# Allegro board Hirose7039_A1.brd
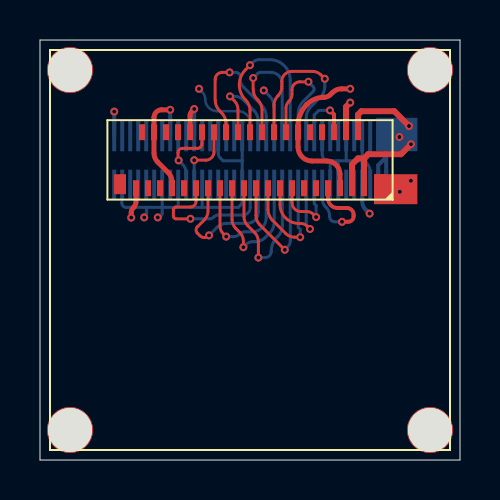
[diagram p0: board, top side]
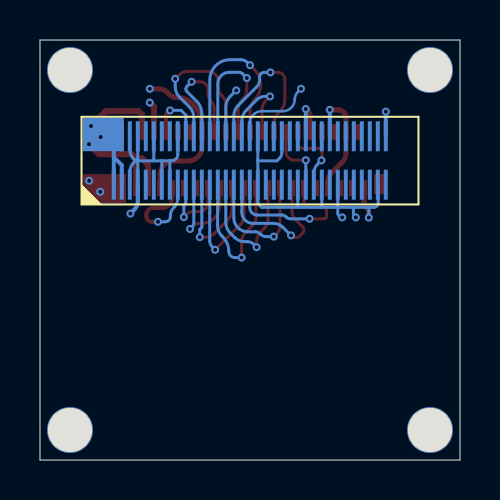
[diagram p1: board, bottom side, seen from below]

Outline 21 x 21 mm; copper layers: TOP, BOTTOM. Coordinates in mm from the lower left corner of the outline.
Outline path: 0,21 0,0 21,0 21,21 0,21

## Design rules (mm)
constraint set DEFAULT: min track width 0.127

## Placement (name value [footprint] x y rotation side)
J3  Hirose FH35C-39S-0.3SHW  [FH35C-39S-0D3SHW]  10.5 13.59 0 top
J8  DF40HC(3.0)-70DS-0.4V(51)  [DF40HC-70DS_]  17.31 16.18 180 bottom
NOREF  -  [unnamed]  19.5 19.5 0 top
NOREF#2  -  [unnamed]  19.5 1.5 0 top
NOREF#3  -  [unnamed]  1.5 19.5 0 top
NOREF#4  -  [unnamed]  1.5 1.5 0 top

## Library data of the parts
J3 = HiroseFPC_0
J8 = Header2x35

## Footprints (pads in the part's own frame, mm; a bottom-side part is the same pattern mirrored in y, then rotated)
DF40HC-70DS_
  rect 0.2x1.5 smd: 1(0,-2.42) 2(0,0) 3(0.4,-2.42) 4(0.4,0) 5(0.8,-2.42) 6(0.8,0) 7(1.2,-2.42) 8(1.2,0) 9(1.6,-2.42) 10(1.6,0) 11(2,-2.42) 12(2,0) 13(2.4,-2.42) 14(2.4,0) 15(2.8,-2.42) 16(2.8,0) 17(3.2,-2.42) 18(3.2,0) 19(3.6,-2.42) 20(3.6,0) 21(4,-2.42) 22(4,0) 23(4.4,-2.42) 24(4.4,0) 25(4.8,-2.42) 26(4.8,0) 27(5.2,-2.42) 28(5.2,0) 29(5.6,-2.42) 30(5.6,0) 31(6,-2.42) 32(6,0) 33(6.4,-2.42) 34(6.4,0) 35(6.8,-2.42) 36(6.8,0) 37(7.2,-2.42) 38(7.2,0) 39(7.6,-2.42) 40(7.6,0) 41(8,-2.42) 42(8,0) 43(8.4,-2.42) 44(8.4,0) 45(8.8,-2.42) 46(8.8,0) 47(9.2,-2.42) 48(9.2,0) 49(9.6,-2.42) 50(9.6,0) 51(10,-2.42) 52(10,0) 53(10.4,-2.42) 54(10.4,0) 55(10.8,-2.42) 56(10.8,0) 57(11.2,-2.42) 58(11.2,0) 59(11.6,-2.42) 60(11.6,0) 61(12,-2.42) 62(12,0) 63(12.4,-2.42) 64(12.4,0) 65(12.8,-2.42) 66(12.8,0) 67(13.2,-2.42) 68(13.2,0) 69(13.6,-2.42) 70(13.6,0)
FH35C-39S-0D3SHW
  rect 0.3x0.8 smd: 1(5.7,0) 2(5.4,2.8) 3(5.1,0) 4(4.8,2.8) 5(4.5,0) 6(4.2,2.8) 7(3.9,0) 8(3.6,2.8) 9(3.3,0) 10(3,2.8) 11(2.7,0) 12(2.4,2.8) 13(2.1,0) 14(1.8,2.8) 15(1.5,0) 16(1.2,2.8) 17(0.9,0) 18(0.6,2.8) 19(0.3,0) 20(0,2.8) 21(-0.3,0) 22(-0.6,2.8) 23(-0.9,0) 24(-1.2,2.8) 25(-1.5,0) 26(-1.8,2.8) 27(-2.1,0) 28(-2.4,2.8) 29(-2.7,0) 30(-3,2.8) 31(-3.3,0) 32(-3.6,2.8) 33(-3.9,0) 34(-4.2,2.8) 35(-4.5,0) 36(-4.8,2.8) 37(-5.1,0) 38(-5.4,2.8) 39(-5.7,0)
  rect 0.6x1 smd: 40(6.5,0.2) 41(-6.5,0.2)
unnamed
  round 2.3 hole 2.2 unplated: (0,0)

## Nets
GND: J3.4 J3.5 J3.12 J3.30 J3.33 J3.36 J3.39 J3.40 J3.41 J8.5 J8.6 J8.7 J8.8 J8.12 J8.13 J8.15 J8.18 J8.37 J8.38 J8.44 J8.47 J8.50 J8.53 J8.56 J8.57 J8.67 J8.70
IR_1V8: J8.9 J8.10 J8.11
IR_3V3: J8.14 J8.16
IR_5V0: J3.1 J3.2 J3.3(VDD50#3) J8.1 J8.2 J8.3 J8.4
IR_D0: J3.13 J8.19
IR_D1: J3.14 J8.24
IR_D2: J3.15 J8.21
IR_D3: J3.16 J8.22
IR_D4: J3.17 J8.23
IR_D5: J3.18 J8.28
IR_D6: J3.19 J8.25
IR_D7: J3.20 J8.26
IR_D8: J3.21 J8.27
IR_D9: J3.22 J8.34
IR_D10: J3.23 J8.29
IR_D11: J3.24 J8.32
IR_D12: J3.25 J8.31
IR_D13: J3.26 J8.49
IR_D14: J8.36
IR_D15: J8.30
IR_HSYNC: J3.28 J8.51
IR_PCLK: J3.29 J8.35
IR_UART_RX: J3.6 J8.20
IR_UART_TX: J3.7 J8.17
IR_VSYNC: J3.27 J8.33

Pads without a net: J3 8 9 10 11 31 32 34 35 37 38; J8 39 40 41 42 43 45 46 48 52 54 55 58 59 60 61 62 63 64 65 66 68 69

## Via types
v1: diameter 0.4, hole 0.2, TOP to BOTTOM, 35 vias

## Routing (per net, layer and track width the routed paths; a pad name or vN(x,y) marks a point on that pad's centre or on a via; arc(x,y) is an arc through that point)
GND: length 52.8
  TOP w0.25: J3.33 6.6,13.92 arc(6.55,14.16) 6.41,14.37 5.89,14.89 arc(5.75,15.1) 5.7,15.34 J3.36 5.7,17.12 arc(5.81,17.4) 6.08,17.51 v1(6.51,17.51) ; J3.30 7.5,17.21 arc(7.52,17.33) 7.59,17.43 v1(7.71,17.55) ; J3.39 4.8,12.9 arc(4.77,12.76) 4.69,12.64 4.67,12.62 arc(4.59,12.5) 4.56,12.36 v1(4.56,12.12) ; v1(15.51,18.56) 15.09,18.56 arc(14.83,18.51) 14.61,18.36 14.52,18.27 arc(14.37,18.17) 14.2,18.14 arc(13.74,18.04) 13.35,17.78 arc(13.02,17.29) 12.9,16.71 J3.12 12.9,15.65 arc(13.11,15.16) 13.6,14.95 14.34,14.95 arc(14.81,14.76) 15,14.29 J3.5
  TOP w0.3: v1(15.51,17.87) 15.3,17.66 J3.4
  BOTTOM w0.15: 6.91,12.63 6.11,12.63 ; 6.91,12.63 8.1,12.63 ; 6.91,12.63 6.91,13.77 ; 6.11,12.63 6.11,13.77 ; 6.11,12.63 6.11,12.35 arc(6.05,12.19) v1(5.89,12.13) ; 6.11,12.63 5.33,12.63 ; 8.1,12.63 9.92,12.63 10.02,12.74 arc(10.09,12.83) 10.11,12.95 10.11,14.94 10.13,14.96 ; 8.1,12.63 8.11,12.64 8.11,13.77 ; J8.12 15.31,14.99 15.34,14.96 ; 15.34,14.96 14.9,14.96 ; 15.34,14.96 16.23,14.96 ; 14.9,14.96 14.91,14.95 J8.13 ; 14.9,14.96 14.54,14.96 ; J8.18 14.11,15.28 arc(14.2,15.05) 14.43,14.96 14.54,14.96 ; 14.54,14.96 14.51,14.93 J8.15 ; 4.56,12.63 5.33,12.63 ; 4.56,12.63 v1(4.56,12.12) ; 4.56,12.63 4.31,12.63 arc(4.15,12.69) 4.09,12.85 4.09,13.75 4.11,13.77 ; 5.33,12.63 5.33,12.32 arc(5.32,12.25) 5.28,12.2 v1(5.21,12.13) ; 16.23,14.96 16.11,15.08 J8.8 ; 16.23,14.96 16.11,14.84 J8.7 ; 16.23,14.96 16.31,14.88 arc(16.46,14.65) 16.51,14.39 J8.5 ; 16.23,14.96 16.31,15.04 arc(16.46,15.27) 16.51,15.53 J8.6 ; 10.13,14.96 9.15,14.96 9.02,15.09 arc(8.94,15.21) 8.91,15.35 8.91,16.18 ; 10.13,14.96 10.11,14.98 10.11,16.18
  BOTTOM w0.2: 6.51,16.18 v1(6.51,17.51) ; v1(16.48,12.32) 16.28,12.52 arc(16.15,12.71) 16.11,12.93 J8.7 ; 3.71,16.18 v1(3.71,17.42) ; 7.71,16.18 v1(7.71,17.55)
  vias: v1(17.99,13.41) v1(18.54,13.96)
IR_5V0: length 13.8
  TOP w0.3: 16.2,15.08 J3.1 ; 16.2,15.08 16.41,15.29 18.05,15.29 v1(18.55,15.79) ; 16.2,15.08 15.9,15.08 15.6,14.78 J3.3 ; v1(18.45,16.7) 17.71,17.44 16.07,17.44 15.9,17.27 J3.2
  BOTTOM w0.2: 17.31,15.13 17.3,15.13 16.91,14.74 J8.3 ; 17.31,15.13 J8.2 ; 17.31,15.13 J8.1
  vias: v1(17.97,16.15)
IR_D0: length 3.9
  TOP w0.15: J3.13 12.6,12.87 arc(12.73,12.55) 13.05,12.42 13.35,12.42 arc(13.52,12.39) 13.66,12.29 v1(13.81,12.15)
  BOTTOM w0.15: J8.19 13.71,12.82 13.81,12.73 v1(13.81,12.15)
IR_D1: length 6.4
  TOP w0.15: v1(13.42,18.91) 12.99,18.91 arc(12.72,18.79) 12.6,18.52 12.6,18.29 arc(12.56,18.11) 12.46,17.95 12.44,17.93 arc(12.34,17.77) 12.3,17.59 J3.14
  BOTTOM w0.15: v1(13.42,18.91) 13.64,18.69 arc(13.69,18.62) 13.7,18.54 arc(13.69,18.48) 13.66,18.43 13.17,17.94 arc(12.98,17.65) 12.91,17.31 12.91,16.18
IR_D2: length 5.2
  TOP w0.15: v1(13.5,11.55) 13.35,11.7 arc(13.21,11.79) 13.04,11.83 12.95,11.83 arc(12.28,12.1) 12,12.77 J3.15
  BOTTOM w0.15: v1(13.5,11.55) 13.39,11.66 arc(13.33,11.75) 13.31,11.86 13.31,13.77
IR_D3: length 8.4
  TOP w0.15: v1(14.24,19.06) 14.04,19.26 arc(13.85,19.38) 13.62,19.43 12.59,19.43 arc(12.24,19.28) 12.09,18.93 12.09,18.66 arc(12.04,18.42) 11.91,18.22 11.88,18.19 arc(11.75,17.99) 11.7,17.75 J3.16
  BOTTOM w0.15: v1(14.24,19.06) 14.24,18.67 arc(14.18,18.38) 14.02,18.14 13.53,17.65 arc(13.37,17.41) 13.31,17.12 13.31,16.18
IR_D4: length 6
  TOP w0.15: v1(13.01,11.14) 12.73,11.14 arc(12.49,11.19) 12.29,11.32 11.62,11.99 arc(11.46,12.23) 11.4,12.52 J3.17
  BOTTOM w0.15: 12.91,13.77 12.91,11.63 13.01,11.53 v1(13.01,11.14)
IR_D5: length 7.3
  TOP w0.15: v1(10.66,19.1) 10.66,18.53 arc(10.71,18.25) 10.87,18.02 10.89,18 arc(11.05,17.77) 11.1,17.49 J3.18
  BOTTOM w0.15: v1(10.66,19.1) 10.89,19.33 arc(10.95,19.37) 11.02,19.38 11.54,19.38 arc(11.94,19.22) 12.11,18.81 12.11,16.18
IR_D6: length 7
  TOP w0.15: v1(12.24,10.51) 10.99,11.76 arc(10.85,11.97) 10.8,12.21 J3.19
  BOTTOM w0.15: v1(12.24,10.51) 12.39,10.66 arc(12.48,10.8) 12.52,10.97 12.52,12.36 12.51,12.36 12.51,13.77
IR_D7: length 9.2
  TOP w0.15: v1(10.5,19.74) 10.28,19.52 arc(9.97,18.76) 10.28,18 arc(10.44,17.76) 10.5,17.47 J3.20
  BOTTOM w0.15: 12.51,16.18 12.51,19 arc(12.21,19.72) 11.49,20.02 10.96,20.02 arc(10.79,19.98) 10.65,19.89 v1(10.5,19.74)
IR_D8: length 8
  TOP w0.15: v1(10.92,10.12) 10.92,10.92 arc(10.87,11.16) 10.73,11.37 10.39,11.71 arc(10.25,11.92) 10.2,12.16 J3.21
  BOTTOM w0.15: v1(10.92,10.12) 11.26,10.12 arc(11.47,10.21) 11.56,10.43 11.56,10.43 arc(11.64,10.82) 11.86,11.15 11.9,11.19 arc(12.06,11.43) 12.12,11.72 12.12,12.81 12.11,12.82 12.11,13.77
IR_D9: length 4.7
  TOP w0.15: v1(9.5,18.18) 9.71,17.97 arc(9.85,17.76) 9.9,17.51 J3.22
  BOTTOM w0.15: v1(9.5,18.18) 9.76,18.18 arc(9.97,18.14) 10.16,18.02 10.69,17.48 arc(10.85,17.24) 10.91,16.95 10.91,16.18
IR_D10: length 7.2
  TOP w0.15: v1(10.17,10.64) 10.17,10.94 arc(10.12,11.18) 9.98,11.39 9.79,11.58 arc(9.65,11.79) 9.6,12.03 J3.23
  BOTTOM w0.15: v1(10.17,10.64) 10.32,10.79 arc(10.46,10.88) 10.63,10.92 10.77,10.92 arc(11.03,10.97) 11.26,11.12 11.49,11.35 arc(11.65,11.59) 11.71,11.88 11.71,13.77
IR_D11: length 7.8
  TOP w0.15: J3.24 9.3,16.83 arc(9.24,17.12) 9.08,17.36 8.98,17.46 arc(8.82,17.7) 8.76,17.99 8.76,19.04 arc(8.86,19.28) 9.11,19.38 v1(9.48,19.38)
  BOTTOM w0.15: v1(9.48,19.38) 9.8,19.38 arc(9.88,19.36) 9.94,19.32 9.96,19.3 arc(10,19.24) 10.02,19.16 10.02,19.01 arc(10.06,18.82) 10.17,18.65 11.09,17.73 arc(11.25,17.49) 11.31,17.2 11.31,16.18
IR_D12: length 6.6
  TOP w0.15: J3.25 9,11.69 arc(9.04,11.5) 9.15,11.33 v1(9.31,11.17)
  BOTTOM w0.15: v1(9.31,11.17) 9.7,11.17 arc(9.84,11.2) 9.96,11.28 9.98,11.3 arc(10.1,11.38) 10.24,11.41 10.61,11.41 arc(11.11,11.61) 11.31,12.11 11.31,13.77
IR_D13: length 3.4
  TOP w0.15: v1(7.71,14.99) 8.28,14.99 arc(8.58,15.11) 8.7,15.41 J3.26
  BOTTOM w0.15: 7.71,13.77 v1(7.71,14.99)
IR_D14: length 4.2
  BOTTOM w0.127: 10.51,16.18 10.51,16.84 arc(10.34,17.27) 9.91,17.44 8.86,17.44 arc(8.44,17.62) 8.26,18.04 arc(8.22,18.23) 8.11,18.4 v1(7.95,18.56)
IR_D15: length 2.5
  BOTTOM w0.15: v1(11.19,18.48) 11.49,18.18 arc(11.65,17.94) 11.71,17.65 11.71,16.18
IR_HSYNC: length 3.8
  TOP w0.15: v1(6.93,14.98) 6.9,15.01 6.9,15.37 arc(6.96,15.52) 7.11,15.58 7.88,15.58 arc(7.95,15.6) 8.02,15.64 8.04,15.66 arc(8.08,15.73) 8.1,15.8 J3.28
  BOTTOM w0.15: v1(6.93,14.98) 7.13,14.78 arc(7.26,14.58) 7.31,14.35 7.31,13.77
IR_PCLK: length 7.7
  TOP w0.15: J3.29 7.8,12.93 arc(7.72,12.73) 7.52,12.65 6.8,12.65 arc(6.71,12.61) 6.67,12.52 6.67,12.19 arc(6.71,12.1) 6.8,12.06 v1(7.52,12.06)
  BOTTOM w0.15: 10.51,13.77 10.51,12.62 arc(10.4,12.36) 10.14,12.25 8.91,12.25 arc(8.8,12.23) 8.71,12.17 8.68,12.14 arc(8.59,12.08) 8.48,12.06 v1(7.52,12.06)
IR_UART_RX: length 3.1
  TOP w0.2: v1(14.5,17.48) 14.7,17.28 J3.6
  BOTTOM w0.15: v1(14.5,17.48) 13.94,17.48 13.71,17.25 J8.20
IR_UART_TX: length 5.5
  TOP w0.2: v1(15.1,11.91) 15.4,11.91 arc(15.6,11.99) 15.68,12.19 15.68,12.27 arc(15.58,12.5) 15.35,12.6 14.88,12.6 arc(14.54,12.74) 14.4,13.08 J3.7
  BOTTOM w0.15: v1(15.1,11.91) 14.74,11.91 arc(14.56,11.99) 14.48,12.17 14.48,12.2 arc(14.44,12.43) 14.31,12.63 14.29,12.65 arc(14.16,12.84) 14.11,13.07 J8.17
IR_VSYNC: length 7.5
  TOP w0.15: v1(8.45,11.23) 8.43,11.21 arc(8.21,11.12) 8,11.21 7.87,11.34 arc(7.8,11.5) 7.87,11.66 8.21,12 arc(8.35,12.21) 8.4,12.45 J3.27
  BOTTOM w0.15: v1(8.45,11.23) 8.86,11.64 arc(9.07,11.78) 9.32,11.83 10.35,11.83 arc(10.75,11.99) 10.91,12.39 10.91,13.77

## Copper pours and planes (outline as drawn; the poured copper is in the pictures)
GND on TOP (solid shape): 18.87,12.79 16.7,12.79 16.7,14.29 18.87,14.29
IR_5V0 on BOTTOM (solid shape): 18.87,15.44 16.81,15.44 16.81,17.11 18.87,17.11
